# Altium PCB PCB1.PcbDoc
Units mil, origin at the board's own origin, x right, y up, seen from the top; angles counter-clockwise.
Board outline 1560 x 870 mil, 2 copper layers (Top Layer, Bottom Layer); 20 components, 12 nets, 58 pads, 4 vias.
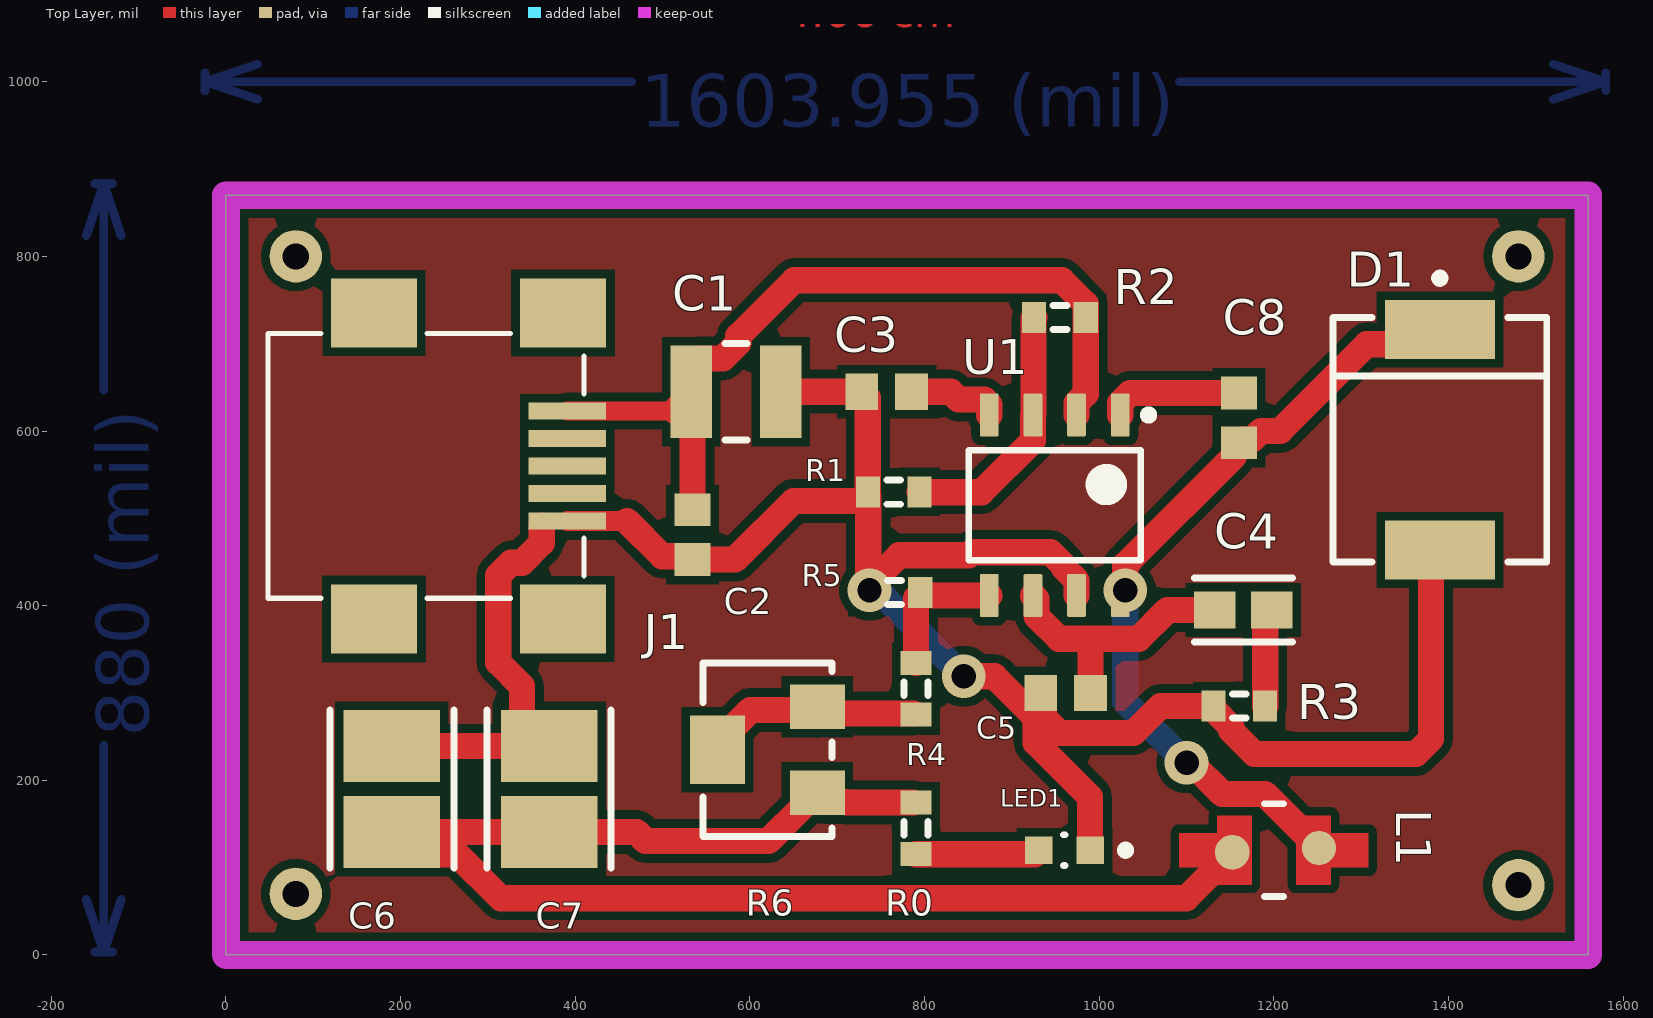
[diagram p0: Top Layer view]
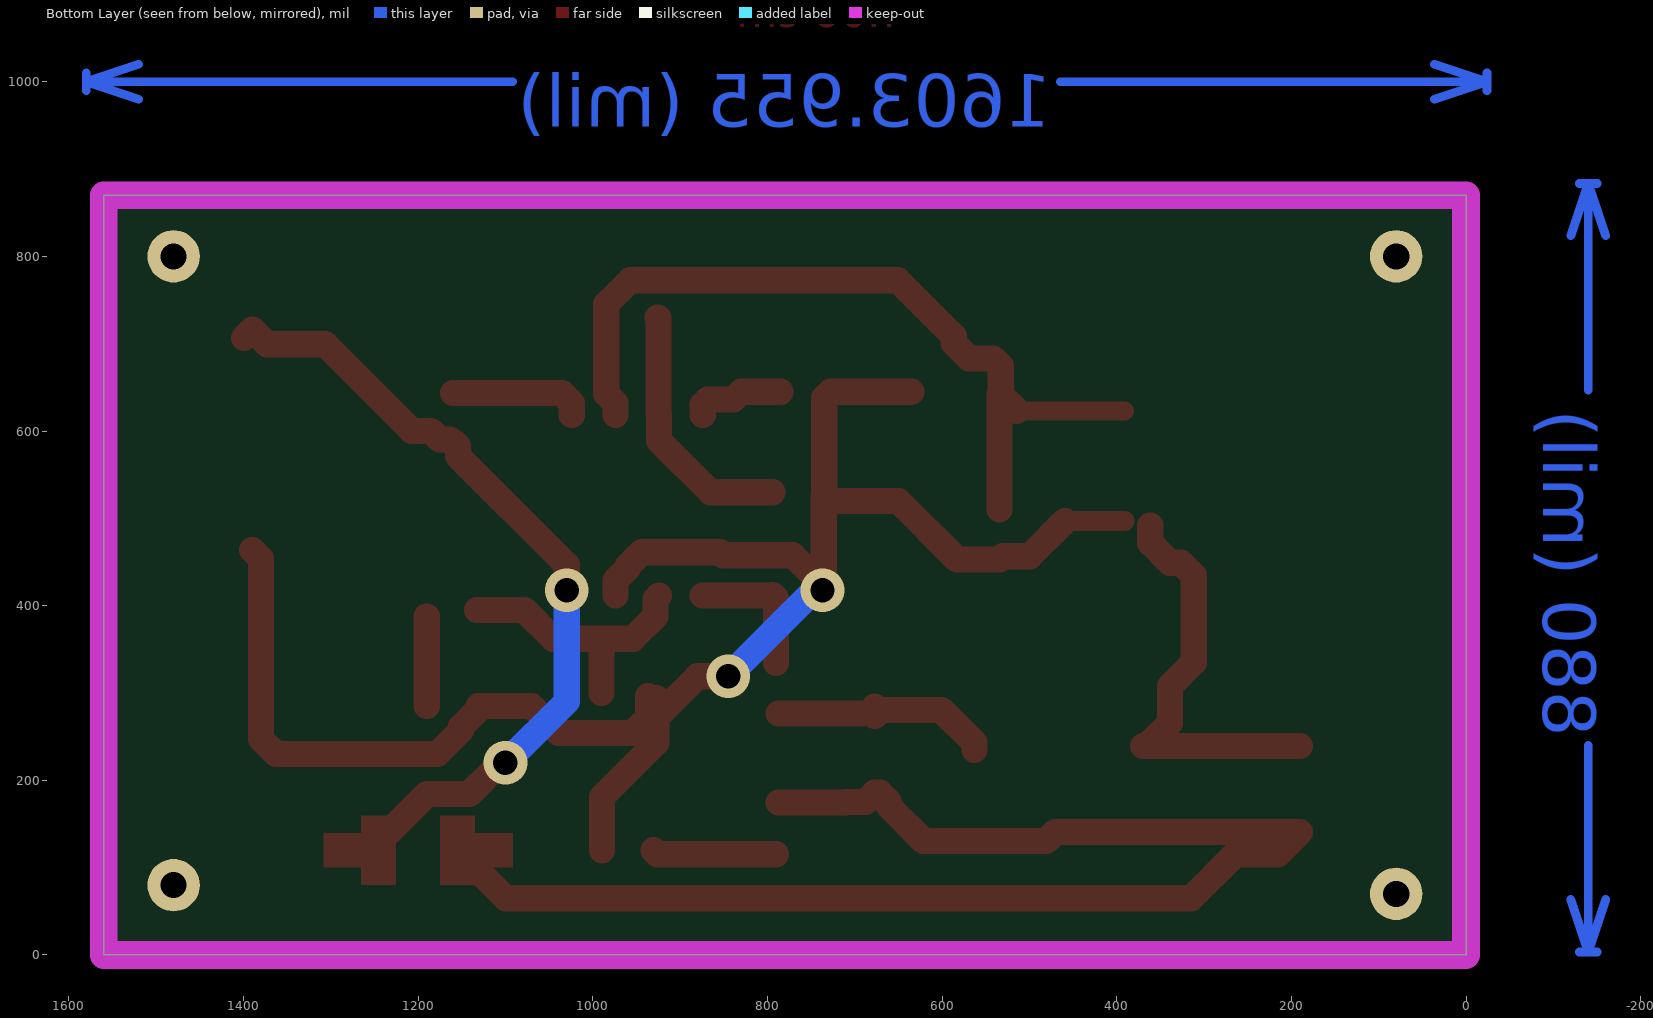
[diagram p1: Bottom Layer view, seen from below]
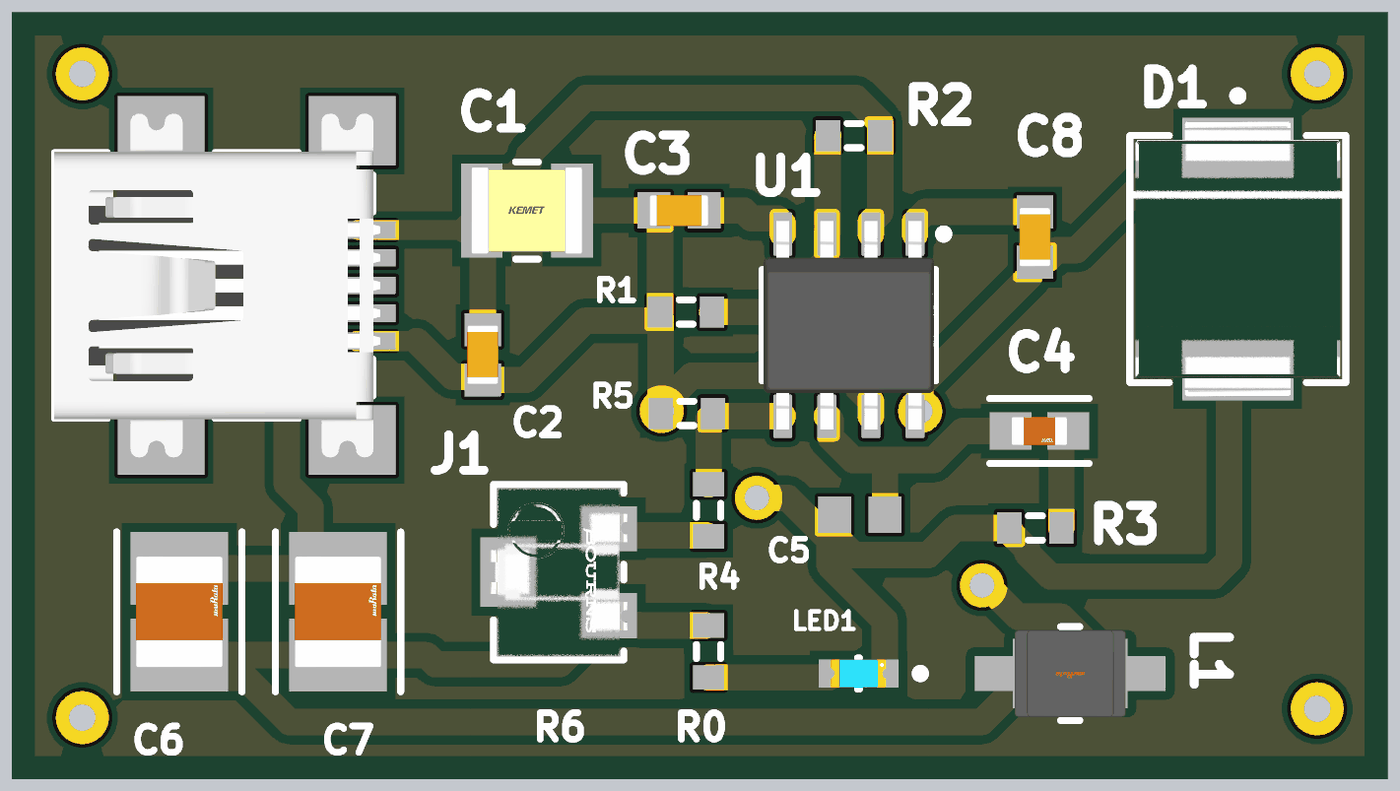
[diagram p2: 3D render of the assembled board from above, using the file's embedded part models]

## Layer stack, top to bottom
Top Solder: solder mask 0.4, Solder Resist, Dk 3.5
Top Layer: signal copper 1.4
Dielectric 1: dielectric 12.6, FR-4, Dk 4.8
Bottom Layer: signal copper 1.4
Bottom Solder: solder mask 0.4, Solder Resist, Dk 3.5

## Board outline
0,0 0,870 1560,870 1560,0

## Design rules (kind name [scope] priority, off if disabled: settings)
Clearance [All] p1: gap=10 ignorepadtopadclearanceinfootprint=FALSE
PolygonConnect [All] p1: connectstyle=Relief reliefconductorwidth=10 reliefentries=4 polygonreliefangle="90 Angle" airgapwidth=10
RoutingVias [All] p1: holewidth=28 width=50 viastyle="Through Hole" minholewidth=28 minwidth=50 maxholewidth=28 maxwidth=50
SolderMaskExpansion [All] p1: expansion=4 istentingtop=FALSE
SupplyNets "Schematic Supply Nets" [InNet('GND')] p1: voltage=0.000
Width [All] p1: maxlimit=30 minlimit=10 preferedwidth=30
30 further rules are at their usual default settings.

## Components (designator, comment, footprint, x,y, rotation, side; value= is the part's Value field where it differs from the comment)
C1 "100uF" FP-C1210C-FS-MFG 584.06,645 r0 top
C2 "100nF" CAPC1608X90X35ML10T15 534.06,481.46 r90 top
C3 "10nF" CAPC1608X90X35ML10T15 756.46,645 r0 top
C4 "1nF" FP-0603-L_1_6_0_15-W_0_81-IPC_A 1165,395 r0 top
C5 "47pF" CAPC1608X90X35ML10T15 961.46,300 r0 top
C6 "47uF" FP-GRM32E-0_3-0_2-IPC_A 190,190 r90 top
C7 "47uF" FP-GRM32E-0_3-0_2-IPC_A 370,190 r90 top
C8 "100nF" CAPC1608X90X35ML10T15 1160,615 r270 top
D1 "SS34" FP-95402-MFG 1390,590 r270 top
J1 "" 651305142821 229.06,560 r270 top
L1 "10uH" FP-LQH32CH_23-MFG 1200,120 r180 top
LED1 "" FP-LB_Q39G-MFG 960,120 r180 top
R0 "2.2" J1-0603 790,145 r270 top
R1 "68k" J1-0603 764.53,530 r0 top
R2 "180k" J1-0603 955,730 r0 top
R3 "27k" J1-0603 1160.47,285 r0 top
R4 "10k" J1-0603 790,305 r270 top
R5 "3.3k" J1-0603 765.47,415 r0 top
R6 "POT5k" FP-3224W-MFG 620,235 r180 top value=10kΩ
U1 "TPS54331D" D0008A_L 949.06,515 r270 top

## Footprints (in the part's own frame and the unit in brackets; to place one, negate y for a bottom-side part, rotate by r counter-clockwise, add the part's x,y. Pads: shape width x height; smd on the part's side, far side on the other; paste and mask are expansions set on the pad)
651305142821 [mm] "Mini USB 2.0 Type AB SMT Horizontal 5 Contacts"
  rect 0.5x2.25 smd: 1(-1.6,4.113) 2(-0.8,4.113) 3(0,4.113) 4(0.8,4.113) 5(1.6,4.113)
  rect 2x2.5 smd: Shell(-4.45,3.988) Shell(-4.45,-1.512) Shell(4.45,3.988) Shell(4.45,-1.512)
  silkscreen extent -3.85,-4.6 3.85,4.6, body extent -4.95,-4.6 4.95,4.8, height 4.1
CAPC1608X90X35ML10T15 [mm] "Chip Capacitor, 2-Leads, Body 1.7x0.9mm, IPC Low Density"
  rect 0.95x1.05 smd: 1(-0.725,0) 2(0.725,0)
  body extent -0.85,-0.45 0.85,0.45, height 0.9
D0008A_L [mm] "SOIC, 8-Leads, Body 5x4mm, Pitch 1.27mm, IPC High Density"
  rrect18% 1.25x0.55 smd: 1(-2.625,1.905) 2(-2.625,0.635) 3(-2.625,-0.635) 4(-2.625,-1.905) 5(2.625,-1.905) 6(2.625,-0.635) 7(2.625,0.635) 8(2.625,1.905)
  silkscreen extent -2.75,-2.5 1.6,2.86, body extent -3,-2.45 3,2.45, height 1.63
FP-0603-L_1_6_0_15-W_0_81-IPC_A [mil]
  rect 47.5x42.06 smd paste+0 mask+0: 1(-32.51,0) 2(32.51,0)
  silkscreen extent -56,-37 56,37, body extent -76,-41 76,41, height 10
FP-3224W-MFG [mm]
  rect 1.6x1.3 smd paste+0 mask+0: 1(-1.45,1.25) 3(-1.45,-1.25)
  rect 1.6x2 smd paste+0 mask+0: 2(1.45,0)
  silkscreen extent -1.88,-2.52 1.88,2.52, body extent -2.35,-2.63 2.35,2.63, height 0.25
FP-95402-MFG [mm]
  rect 1.72x3.2 smd paste+0 mask+0: 1(-3.205,0) 2(3.205,0)
  silkscreen extent -4.82,-3.11 3.55,3.11, body extent -4.17,-3.21 4.17,3.21, height 0.25
FP-C1210C-FS-MFG [mm]
  rect 1.2x2.7 smd paste+0 mask+0: 1(-1.3,0) 2(1.3,0)
  silkscreen extent -0.33,-1.4 0.33,1.4, body extent -2,-1.5 2,1.5, height 0.25
FP-GRM32E-0_3-0_2-IPC_A [mil]
  rect 82.79x110.48 smd paste+0 mask+0: 1(-49.24,0) 2(49.24,0)
  silkscreen extent -91,-71 91,71, body extent -110,-75 110,75, height 10
FP-LB_Q39G-MFG [mm]
  rect 0.8x0.8 smd paste+0 mask+0: 1(-0.75,0) 2(0.75,0)
  silkscreen extent -1.9,-0.45 0.03,0.45, body extent -1.25,-0.55 1.25,0.55, height 0.25
FP-LQH32CH_23-MFG [mil]
  round 39.16 smd paste+0 mask+0: 1(-51.67,-2.46)
  round 39.86 smd paste+0 mask+0: 2(47.74,2.46)
  Top Layer region: 25.59,-39.37 25.59,39.37 64.96,39.37 64.96,19.69 108.27,19.69 108.27,-19.69 64.96,-19.69 64.96,-39.37
  Top Layer region: -64.96,-39.37 -64.96,-19.69 -108.27,-19.69 -108.27,19.69 -64.96,19.69 -64.96,39.37 -25.59,39.37 -25.59,-39.37
  silkscreen extent -11,-53 11,53, body extent -112,-57 112,57, height 10
J1-0603 [mm] "Chip Resistor, Body 1.6x0.8mm, IPC High Density"
  rect 0.7x0.9 smd: 1(-0.75,0) 2(0.75,0)
  silkscreen extent -0.2,-0.35 0.2,0.35, body extent -0.85,-0.48 0.85,0.48, height 0.9

## Part data
C1: library part CMP-03020-034653-1, "CAP CER 100UF 16V X5R 1210", Case Code (Imperial)=1210, Case Code (Metric)=3225, Dielectric=X5R, Dielectric Material=Ceramic, Max Operating Temperature=85°C, Min Operating Temperature=-55°C, Package Quantity=1000, Tolerance=20%, Voltage Rating=16V, Capacitance=100uF, Case/Package=1210, Depth=2.5mm, Lead Free="Lead Free", Length=3.2mm, Packaging="Tape and Reel", REACH SVHC="No SVHC", Termination=SMD/SMT, Thickness=0.106inch, Voltage Rating (DC)=16V, Weight=0.000564oz, Width=0.098inch
C2 C8: library part CMP-2100-03643-1, "Chip Capacitor, 0.1 uF, +/- 10%, 50 V, -55 to 125 degC, 0603 (1608 Metric), RoHS, Tape and Reel", Case Code (Imperial)=0603, Case Code (Metric)=1608, Dielectric=X7R, Dielectric Material=Ceramic, Insulation Resistance=10GR, Manufacturer=Murata, Max Operating Temperature=125degC, Min Operating Temperature=-55degC, Package Description="2-Pin Surface Mount Device, Body 1.6 x 0.8 mm", Package Quantity=1, Tolerance=10%, Voltage=50V, Capacitance=100nF, Case/Package=0603, Contact Plating=Tin, Datasheet URL=http://psearch.en.murata.com/capacitor/product/GRM188R71H104KA93%23.pdf, Datasheet Version=42675.0, Depth=0.8mm, Height=0.8mm, Lead Free=LeadFree, Length=1.6mm, Manufacturer URL=http://www.murata.com/, Material=Ceramic, Mount=SurfaceMount, Number of Pins=2, Package Reference=0603, Packaging=TapeandReel, Radiation Hardening=No, REACH SVHC=NoSVHC, RoHSCompliant=true, Termination=SMD/SMT, Thickness=0.035inch, Voltage Rating=50V, Voltage Rating (DC)=50V, Width=0.8mm
C3: library part CMP-2100-03642-1, "Chip Capacitor, 10 nF, +/- 10%, 50 V, -55 to 125 degC, 0603 (1608 Metric), RoHS, Tape and Reel", Case Code (Imperial)=0603, Case Code (Metric)=1608, Dielectric=X7R, Dielectric Material=Ceramic, Insulation Resistance=10GR, Manufacturer=Murata, Max Operating Temperature=125degC, Min Operating Temperature=-55degC, Package Description="2-Pin Surface Mount Device, Body 1.6 x 0.8 mm", Package Quantity=1, Tolerance=10%, Voltage=50V, Capacitance=10nF, Case/Package=0603, Datasheet URL=http://search.murata.co.jp/Ceramy/image/img/A01X/G101/ENG/GRM188R71H103KA01-01.pdf, Datasheet Version=42401.0, Depth=0.8mm, Height=0.8mm, Lead Free=LeadFree, Length=1.6mm, Manufacturer URL=http://www.murata.com/, Material=Ceramic, Mount=SurfaceMount, Number of Pins=2, Package Reference=0603, Packaging=TapeandReel, REACH SVHC=Unknown, RoHSCompliant=True, Termination=SMD/SMT, Thickness=0.035inch, Voltage Rating=50V, Voltage Rating (DC)=50V, Width=0.031inch
C4: library part CMP-2006-04378-2, "General Purpose Ceramic Capacitor, 0603, 1nF, 10%, X7R, 15%, 50V", Case Code (Imperial)=0603, Case Code (Metric)=1608, Dielectric=X7R, Dielectric Material=Ceramic, Max Operating Temperature=125°C, Min Operating Temperature=-55°C, Package Quantity=4000, Tolerance=10%, Voltage=50V, Capacitance=1nF, Case/Package=0603, Construction=Flat, Contact Plating=Tin, Depth=0.81mm, Height=0.9mm, Lead Free="Lead Free", Length=1.6mm, Mount="Surface Mount", Number of Pins=2, Packaging="Tape and Reel", Radiation Hardening=No, REACH SVHC="No SVHC", RoHS Compliant=Yes, Series=-, Termination=SMD/SMT, Thickness=0.035inch, Voltage Rating=50V, Voltage Rating (DC)=50V, Weight=7.1E-05oz, Width=0.032inch
C5: library part CMP-2006-02672-1, Manufacturer=Murata, Part Number=GRM1885C1H470JA01D
C6 C7: library part CMP-06035-000110-2, "Chip Multilayer Ceramic Capacitors for General Purpose, 1210, 47uF, X6S, 22%, 10%, 16V", Case Code (Imperial)=1210, Case Code (Metric)=3225, Dielectric=X6S, Max Operating Temperature=105°C, Min Operating Temperature=-55°C, Package Quantity=1000, Tolerance=10%, Voltage=16V, Capacitance=47uF, Case/Package=1210, Depth=2.5mm, Height=2.5mm, Lead Free="Lead Free", Length=3.2mm, Material=Ceramic, Mount="Surface Mount", Packaging="Tape and Reel", REACH SVHC="No SVHC", Termination=SMD/SMT, Thickness=0.106inch, Voltage Rating=16V, Voltage Rating (DC)=16V, Weight=0.00388oz, Width=2.5mm
D1: library part CMP-02539-000012-1, "DIODE SCHOTTKY 40V 3A DO214AB", Forward Current=3A, Manufacturer=Vishay, Manufacturer Part Number=SS34-E3/57T, Max Junction Temp=+150°C, Max Repetitive Reverse Voltage=40V, Max Surge Forward Current=100A, Package=95402, Peak Reverse Current=0.5mA, Temperature="-55°C to +150°C", Temperature Range Low=-55°C, Automotive=No, Category=Diode, ComponentLink2Description=Datasheet, ComponentLink2URL=http://www.vishay.com/docs/88751/ss32.pdf, Device Class L1="Discrete Semiconductors", Device Class L2=Diodes, Device Class L3="Schottky Diodes", Digikey Description="DIODE SCHOTTKY 40V 3A DO214AB", Footprint Url=http://www.vishay.com/docs/95402/smc.pdf, Height=2.62mm, Lead Free=Yes, Mouser Description="Schottky Diodes & Rectifiers 3.0 Amp 40 Volt", Octopart=https://octopart.com/ss34-e3%2F57t-vishay-39552907, RoHS=TRUE, Standoff Height=0mm, Temperature Range High=+150°C
J1: library part CMP-1502-03247-2, Contact Resistance=20mΩ, Current Rating=1A, Insulation Resistance=1GΩ, Max Operating Temperature=105°C, Min Operating Temperature=-40°C, Operating Supply Voltage=30V, Connector Type=USB, Contact Material=Copper, Contact Plating=Gold, Features=Shielded, Gender=Receptacle, Lead Free="Lead Free", Mount="Horizontal, Surface Mount", NexarPartId=19991175, Number of Contacts=5, Number of Pins=5, Orientation=Horizontal, Packaging="Tape and Reel", REACH SVHC=Unknown, RoHS=Compliant, Termination=SMD/SMT, USB Standard="USB 2.0"
L1: library part CMP-2000-06582-4, "Wire Wound Ferrite Inductor for Power Lines 10μH ±10% 0.572Ω 300mA 1210", Case Code (Imperial)=1210, Case Code (Metric)=3225, Current Rating=300mA, DC Resistance (DCR)=572mR, frequency=26MHz, Max Operating Temperature=85°C, Min Operating Temperature=-25°C, Package Quantity=2000, Resistor Type=Wirewound, Test Frequency=1MHz, Tolerance=10%, Case/Package=1210, Core Material=Ferrite, DC Current=300mA, Depth=2.7mm, Height=2mm, Height - Seated (Max)=0.067inch, Inductance=10uH, Lead Free="Lead Free", Length=3.2mm, Max DC Current=300mA, Military Standard=Not, Mount="Surface Mount", Packaging="Tape and Reel", Radiation Hardening=No, Rated Current-Max=300mA, RoHS Compliant=Yes, Self Resonant Frequency=26MHz, Series=LQH32C_23, Shielding=Unshielded, Termination=SMD/SMT, Weight=0.002116oz, Width=2.5mm
LED1: library part CMP-62016-000036-2, "LED BLUE DIFFUSED 0603 SMD", Case Code (Imperial)=0603, Case Code (Metric)=1608, Color=Blue, Forward Voltage=2.85V, Lens Color=White, Test Current=5mA, Case/Package=0603, Dominant Wavelength=470nm, Height=0.4mm, Length=1.6mm, Lens Size=0.8mm, Lens Style=Flat, Lens Transparency=Diffused, Luminous Flux=0.07lm, Luminous Intensity=29.5mcd, Mount="Surface Mount", Number of LEDs=1, Number of Pins=2, Packaging="Tape and Reel", Radiation Hardening=No, Series="CHIPLED 0603", Viewing Angle=135°, Width=0.8mm
R0 R1 R2 R3 R4 R5: library part Res3, "Resistor", LatestRevisionDate=29-May-2009, LatestRevisionNote="IPC-7351 Footprint Added.", PackageDescription="Chip Resistor", PackageReference=J1-0603, Published=8-Jun-2000, Publisher="Altium Limited"
R6: library part CMP-2000-05077-2, "TRIMMER 10K OHM 0.25W J LEAD TOP", Manufacturer=Bourns, Manufacturer Part Number=3224W-1-103E, Package=3224W, Power Rating=250mW, Resistance=10kΩ, Temperature="-65°C to +150°C", Temperature Coefficient=100ppm/°C, Temperature Range High=+150°C, Temperature Range Low=-65°C, Tolerance=10%, Voltage Rating=300V, Automotive=No, Category=Res, ComponentLink2Description=Datasheet, ComponentLink2URL=https://upverter.com/datasheet/a166fca85da25564670351d2dc712345c058bc40.pdf, Composition=Cermet, Device Class L1="Passive Components", Device Class L2=Resistors, Device Class L3="Variable Resistors and Potentiometers", Digikey Description="TRIMMER 10K OHM 0.25W J LEAD TOP", Height=5.55mm, Lead Free=Yes, Mouser Description="Trimmer Resistors - SMD 4mm 10Kohms 10% Square Cermet Sealed", Octopart=https://octopart.com/3224w-1-103e-bourns-14818, RoHS=TRUE, Series=3224, Standoff Height=0.2mm
U1: library part CMP-0323-00203-3, "Buck Step Down Regulator with 3.5 to 28 V Input and 0.8 to 25 V Output, -40 to 150 degC, 8-Pin SOIC (D), Green (RoHS & no Sb/Br)", Manufacturer="Texas Instruments", Rating=Catalog, Switch Current Limit(Typ)(A)=3.5, Code_JEDEC=MS-012AA, ComponentLink1Description=Datasheet, ComponentLink1URL=http://www.ti.com/general/docs/lit/getliterature.tsp?genericPartNumber=TPS54331&fileType=pdf, ComponentLink2Description="Package Specification", ComponentLink2URL=http://www.ti.com/litv/pdf/msoi002j, ComponentLink3Description="URL Link1", ComponentLink3URL="Samples URL:http://www.ti.com/product/tps54331#samples", DatasheetVersion=SLVS839D, Duty Cycle(Max)(%)=90, Eco-Plan="Green (RoHS & no Sb/Br)", Iout(Max)(A)=3, Iq(Typ)(mA)=0.11, Mounting Technology="Surface Mount", PackageDescription="8-Pin Plastic Small Outline Integrated Circuit, 4.9 x 3.9 mm, Pitch 1.27 mm Pitch", PackageReference=D0008A, PackageVersion="revM, Jun-2011", PartNumber=TPS54331D, Regulated Outputs(#)=1, SubFamily="Step-Down Regulator", Topology=Buck, Vin(Max)(V)=28, Vin(Min)(V)=3.5, Vout(Max)(V)=25, Vout(Min)(V)=0.8

## Free pads (board coordinates)
  round 60 hole 30: 4(1480,80) 5(1480,800) 6(80,800) 7(80,70)

## Via types
v1: diameter 50, hole 28, Top Layer to Bottom Layer, 4 vias

## Nets (pads, with @x,y where several pads share a name; then routed paths per layer and width w, separated by ;. In a path a pad name is that pad's centre, name@x,y a point inside that pad or via, vN(x,y) a via of type N, cw(c..) or ccw(c..) an arc to the next point about the centre after c; other vN are vias at no path point)
GND: C1.2 C2.1 C3.1 C5.1 C6.2 C7.2 D1.2 J1.5 LED1.1 R1.1 R3.1 R5.1 U1.7 | length 2666.8
  Top Layer w23: J1.5 459.12,497.01
  Top Layer w30: C6.2 C7.2 365.25,239.24 338.85,265.63 338.85,308.06 311.83,335.08 311.83,434.53 326.48,449.17 338.94,449.17 361.67,471.9 J1.5@361.67,491.85 ; 459.12,497.01 499.52,456.61 530.35,456.61 C2.1 582.91,452.91 650,520 726.22,520 735,528.78 R1.1 735,637.91 C3.1 C1.2 ; R5.1@735.47,415.47 R1.1@735.47,525.59 ; v1@747.28,434.14 770.87,457.72 850.47,457.72 854.01,461.26 944.1,461.26 959.88,445.47 959.88,443.01 974.06,428.83 U1.7 ; v1(844.79,319.25) 879.9,319.25 927.24,271.9 ; C5.1@927.24,294.33 927.24,271.9 ; C5.1@936.61,296.3 936.61,271.9 954.19,254.33 1039.33,254.33 1070,285 R3.1 1130.94,281.06 1151.22,260.79 1151.22,256.93 1178.15,230 1362.43,230 1380,247.57 1380,453.82 D1.2 ; LED1.1 989.53,180.75 927.24,243.03 927.24,271.9
  Bottom Layer w30: v1(736.91,417.72) 746.33,417.72 v1(844.79,319.25)
NetC1_1: C1.1 C2.2 J1.1 R2.2 U1.2 | length 957.5
  Top Layer w22: J1.1 C1.1@514.25,622.99
  Top Layer w30: C1.1@514.25,622.99 532.87,641.61 C1.1 ; C2.2 534.06,643.82 C1.1 ; U1.2 974.06,632.13 984.53,642.6 984.53,745.14 956.95,772.72 650.83,772.72 586.61,708.5 586.61,700.72 569.04,683.15 541.5,683.15 532.87,674.53 C1.1
NetC3_2: C3.2 U1.4 | length 107
  Top Layer w30: C3.2 829.94,645 838.94,636 868.23,636 874.06,630.18 U1.4
NetC4_1: C4.1 C5.2 U1.6 | length 316.2
  Top Layer w30: U1.6 928.23,407.48 928.23,387.83 954.01,362.05 990,362.05 ; C5.2 990,362.05 ; C4.1 1078.11,395 1045.16,362.05 990,362.05
NetC4_2: C4.2 R3.2 | length 113.1
  Top Layer w10: C4.2@1190,387.49 C4.2
  Top Layer w30: R3.2 C4.2@1190,387.49
NetC6_1: C6.1 C7.1 L1.2 R0.1 R6.1 | length 1680.8
  Top Layer w30: R6.1@671.18,185.79 660.59,175.2 660.59,169.89 621.33,130.63 480.37,130.63 470.24,140.76 C7.1 C6.1 215.64,115.13 264.64,115.13 314.77,65 1099.72,65 L1.2 1124.53,89.8 ; R6.1 687.68,175.2 710.49,175.2 711.16,174.53 R0.1@787.28,174.53
NetC8_1: C8.1 U1.1 | length 154.5
  Top Layer w30: U1.1 1024.06,632.13 1035.47,643.54 C8.1
NetC8_2: C8.2 D1.1 L1.1 U1.8 | length 939.8
  Top Layer w10: 1029.88,446.85 1035.51,452.48
  Top Layer w30: v1(1029.88,417.48) 1029.88,446.85 ; 1035.51,452.48 1154.33,571.3 1154.33,582.76 1158.03,586.46 C8.2 1163.7,590.16 1175.16,590.16 1185.16,600.16 1207.28,600.16 1306.41,699.28 1373.1,699.28 D1.1 D1.1@1399.51,706.67 ; v1(1100,220) 1105.41,220 1141.04,184.37 1189.76,184.37 L1.1
  Bottom Layer w30: v1(1029.88,417.48) 1029.88,290.12 v1(1100,220)
NetLED1_2: LED1.2 R0.2 | length 142.3
  Top Layer w30: R0.2 925.94,115.47 LED1.2
NetR1_2: R1.2 R2.1 U1.3 | length 296
  Top Layer w30: R1.2 865,530 924.06,589.06 U1.3 924.76,619.06 924.76,729.29 R2.1
NetR4_1: R4.1 R5.2 U1.5 | length 159.8
  Top Layer w10: R5.2 R5.2@798.35,411.65
  Top Layer w30: R4.1 790,408.5 R5.2@793.78,412.28 ; R5.2@798.35,411.65 U1.5
NetR4_2: R4.2 R6.2 R6.3 | length 250.6
  Top Layer w30: R6.2 562.91,242.87 600.59,280.55 673.43,280.55 R6.3 ; R6.3@677.09,273.62 680.16,276.69 R4.2@787.28,276.69
pads on no net: J1.2 J1.3 J1.4 J1.Shell
copper on no net: | length 2035.8
  Bottom Layer w10: -160,63.53 -140,3.53 ; -160,823.53 -140,883.53 ; -150,3.53 -130,3.53 ; -150,883.53 -130,883.53 ; -140,240 -140,3.53 ; -140,647.06 -140,883.53 ; -120,63.53 -140,3.53 ; -120,823.53 -140,883.53 ; -23.96,990 -23.96,1010 ; 36.04,980 -23.96,1000 ; 36.04,1020 -23.96,1000 ; 464.51,1000 -23.96,1000 ; 1091.53,1000 1580,1000 ; 1520,980 1580,1000 ; 1520,1020 1580,1000 ; 1580,990 1580,1010

## Polygon pours and split planes (outlines as drawn)
no net on Top Layer "NONET_L01_P000" (solid, pour order 0): 1560,870 0,870 0,0 1560,0

## Keep-outs
Keep-Out Layer:
  the board outline again, w32

## Other copper
Top Layer:
  text "4.06 cm" at 640,1050.67 h60
  text "2.24 cm" at -200.61,339.94 h60 r90
Bottom Layer:
  text "1603.955 (mil)" at 474.51,948.3 h60
  text "880 (mil)" at -88.3,250 h60 r90